# Altium PCB PCB1.PcbDoc (part 2 of 2)
Units mm, origin at the board's own origin, x right, y up, seen from the top; angles counter-clockwise.
Board outline 79.12 x 76.83 mm, 4 copper layers (Top Layer, GND, PWR, Bottom Layer), stack 1.586 mm thick; 64 components, 60 nets, 265 pads, 89 vias.
Unrouted connection lines stored in the file: 60.
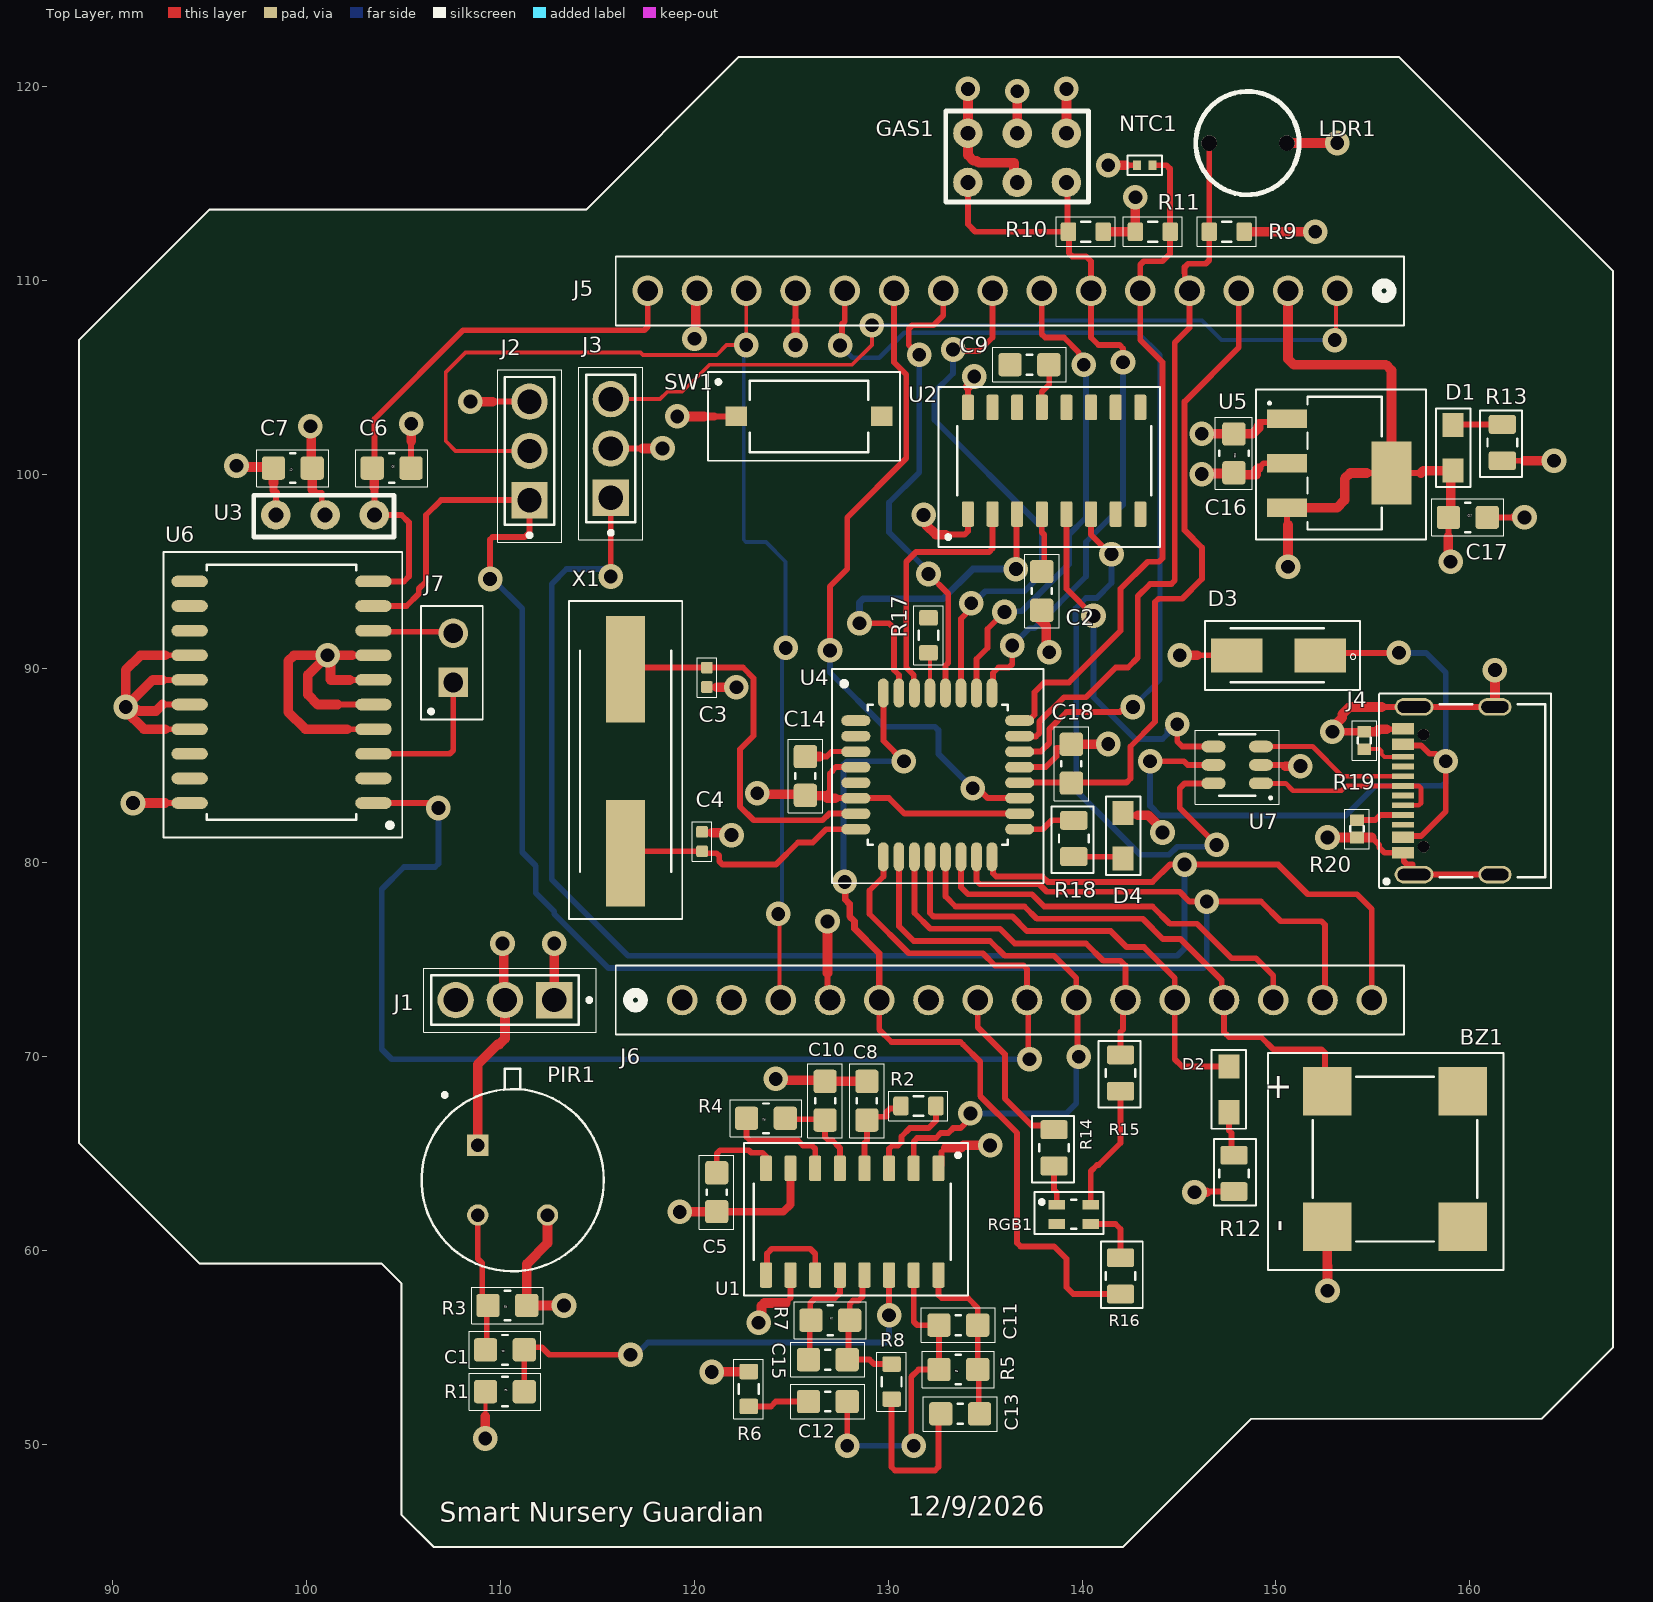
[diagram p0: Top Layer view]

## Via types
v1: diameter 1.27, hole 0.711, Top Layer to Bottom Layer, 89 vias

## Nets (pads, with @x,y where several pads share a name; then routed paths per layer and width w, separated by ;. In a path a pad name is that pad's centre, name@x,y a point inside that pad or via, vN(x,y) a via of type N, cw(c..) or ccw(c..) an arc to the next point about the centre after c; other vN are vias at no path point) (continued)
GND: (continued)
  Top Layer w0.5: 92.583,88.138 92.248,87.803 91.356,87.803 91.295,87.864 90.825,87.864 v1(90.678,88.011) ; 92.583,89.408 92.075,89.408 v1(90.678,88.011) ; 92.71,86.868 91.613,86.868 90.678,87.803 v1(90.678,88.011) ; 92.71,90.678 91.44,90.678 90.678,89.916 v1(90.678,88.011) ; v1(96.393,100.457) 96.456,100.393 98.234,100.393 C7.2 98.298,99.568 ; 101.6,88.138 100.584,88.138 100.076,88.646 100.076,89.662 v1(101.092,90.678) ; 102.108,86.868 99.949,86.868 99.06,87.757 99.06,90.385 99.353,90.678 v1(101.092,90.678) ; 102.235,89.408 101.258,89.408 101.239,89.427 101.239,90.531 v1(101.092,90.678) ; 102.362,90.678 v1(101.092,90.678) ; 105.41,101.727 v1(105.41,102.616) ; v1(108.458,103.759) 109.601,103.759 ; v1(109.22,50.292) 109.22,51.435 ; PIR1.3 112.431,60.361 111.363,59.293 R3.1 v1(113.284,57.15) ; J1.1 v1(112.776,75.819) ; v1(119.126,102.997) 120.523,102.997 ; v1(119.253,61.976) 119.261,61.984 C5.2@121.15,61.984 ; v1(120.015,107.007) 120.078,107.07 120.078,109.41 J5.14 ; v1(120.904,53.721) 120.915,53.732 122.798,53.732 R6.1 ; 120.904,81.534 121.793,81.534 v1(121.92,81.407) ; 121.158,89.027 v1(122.174,89.027) ; v1(123.317,56.261) 123.464,56.408 123.464,57.131 123.61,57.277 124.714,57.277 ; v1(124.206,68.834) 124.269,68.77 126.682,68.77 C10.2 C8.2 ; C14.2 126.476,85.455 ; v1(126.87,76.957) 126.873,76.954 126.873,74.295 ; v1(131.826,97.917) 131.953,97.79 131.953,97.409 132.461,96.901 132.969,96.901 ; GAS1.2 v1(136.652,119.761) ; C2.2 137.795,92.869 137.795,92.553 138.156,92.193 138.156,90.984 v1(138.303,90.837) ; C18.2 139.454,86.098 141.343,86.098 v1(141.351,86.106) ; R10.2 R11.2 v1(142.748,114.3) ; 142.875,82.423 143.413,82.423 144.145,81.691 v1(144.145,81.538) ; v1(145.796,62.992) 146.431,62.992 ; v1(146.173,100.02) 146.209,100.056 147.792,100.056 C16.2 147.932,99.988 148.971,99.988 148.971,100.203 149.098,100.33 ; R9.2 v1(152.019,112.522) ; 150.495,84.963 v1(151.257,84.963) ; BZ1.N 152.639,59.197 152.654,59.182 v1(152.654,57.912) ; v1(152.654,81.28) R20.2 154.94,81.28 ; v1(152.908,86.741) 152.908,86.949 153.409,87.45 153.409,87.623 153.797,88.011 155.448,88.011 ; R19.2 155.194,86.741 155.321,86.868 155.702,86.868 ; J4.S4 v1(161.29,89.916) ; v1@162.306,97.79 v1(162.814,97.79) ; 162.814,100.711 v1(164.338,100.711)
NetC1_1: C1.1 R1.2 U1.14 | length 24.8
  Top Layer w0.3: R1.2 C1.1 111.363,54.991 112.141,54.991 112.522,54.61 v1(116.713,54.61) ; v1(130.048,56.642) U1.14
  Bottom Layer w0.3: v1(116.713,54.61) 116.975,54.61 117.61,55.245 129.872,55.245 130.048,55.421 v1(130.048,56.642)
NetC1_2: C1.2 PIR1.2 R3.2 | length 7.2
  Top Layer w0.3: PIR1.2 108.839,59.559 109.063,59.335 109.063,57.45 R3.2 109.299,57.087 109.299,54.927 C1.2
NetC2_1: C2.1 U2.4 | length 2.9
  Top Layer w0.3: U2.4 137.922,97.028 138.049,96.901 C2.1@138.049,95.123
NetC5_1: C5.1 U1.8 | length 4.4
  Top Layer w0.3: C5.1 121.158,64.975 121.334,65.151 122.809,65.151 122.936,65.024 123.522,65.024 123.698,64.848 U1.8
NetC8_1: C8.1 R2.1 U1.4 | length 4.7
  Top Layer w0.3: U1.4 128.778,65.532 128.905,65.659 C8.1 129.081,66.883 129.921,66.883 129.921,67.134 130.097,67.31 130.534,67.31 R2.1
NetC9_1: C9.1 U2.13 | length 2.4
  Top Layer w0.3: U2.13 137.922,104.267 138.303,104.648 138.303,105.648 C9.1
NetC10_1: C10.1 R4.1 U1.5 | length 5
  Top Layer w0.3: R4.1 124.746,66.754 126.698,66.754 C10.1 126.746,65.835 126.922,65.659 127.127,65.659 127.508,65.278 U1.5
NetC12_1: C12.1 R6.2 | length 3.2
  Top Layer w0.3: R6.2 123.952,51.943 124.206,52.197 C12.1
NetC13_2: C13.2 R8.2 | length 8.9
  Top Layer w0.3: R8.2 130.175,48.817 130.351,48.641 132.412,48.641 132.588,48.817 132.588,51.435 C13.2
NetD1_2: D1.2 R13.1 | length 2.6
  Top Layer w0.3: D1.2 159.164,102.586 R13.1
NetD2_2: D2.2 R12.2 | length 2.3
  Top Layer w0.3: D2.2 147.574,66.167 147.701,66.04 147.701,65.024 R12.2
NetD4_1: D4.1 R18.2 | length 2.6
  Top Layer w0.3: R18.2 142.019,80.294 D4.1
NetJ4_A5: J4.A5 R20.1 | length 2.5
  Top Layer w0.3: R20.1 155.118,82.18 155.381,82.443 J4.A5
NetJ4_B5: J4.B5 R19.1 | length 2.2
  Top Layer w0.2: R19.1 154.57,85.852 155.331,85.852 155.448,85.735 155.448,85.598 155.603,85.443 J4.B5
NetJ7_1: J7.1 U6.3 | length 7.7
  Top Layer w0.3: U6.3 107.393,85.598 107.569,85.774 J7.1
NetJ7_2: J7.2 U6.8 | length 4.2
  Top Layer w0.3: U6.8 103.512,91.891 107.499,91.891 J7.2
NetR2_2: R2.2 U1.3 | length 5
  Top Layer w0.3: U1.3 130.048,65.229 130.224,65.405 130.507,65.405 130.683,65.581 130.683,65.864 131.113,66.294 132.08,66.294 132.461,66.675 R2.2
NetR4_2: R4.2 U1.6 | length 5.8
  Top Layer w0.3: R4.2 122.698,65.835 122.874,65.659 125.349,65.659 125.603,65.405 126.062,65.405 126.238,65.229 U1.6
NetR14_2: R14.2 RGB1.1 | length 2
  Top Layer w0.3: R14.2 138.557,63.119 138.698,62.978 RGB1.1
NetR15_2: R15.2 RGB1.2 | length 6.5
  Top Layer w0.3: RGB1.2 140.448,64.072 140.765,64.389 140.843,64.389 141.986,65.532 R15.2
NetR16_2: R16.2 RGB1.4 | length 3.1
  Top Layer w0.3: RGB1.4 141.724,61.349 141.986,61.087 R16.2
RESET: C9.2 J2.2 J5.13 J6.3 R17.2 SW1.2 U4.29 | length 64.9
  Top Layer w0.2: J2.2 107.686,101.219 107.188,101.717 107.188,105.283 108.204,106.299 117.221,106.299 117.348,106.172 121.158,106.172 121.666,106.68 v1(122.682,106.68) J5.13 ; v1(124.333,77.343) 124.396,77.279 124.396,72.962 J6.3 ; R17.2 132.154,90.731 U4.29
  Bottom Layer w0.2: v1(122.682,106.68) 122.555,106.553 122.555,96.637 122.672,96.52 123.698,96.52 124.714,95.504 v1(124.714,91.059) 124.523,90.868 124.523,77.837 124.234,77.548 124.128,77.548 v1(124.333,77.343)
RX: J6.2 U2.3 U4.31 | length 18
  Top Layer w0.3: v1(128.524,92.329) 130.048,92.329 130.302,92.075 130.302,89.916 130.556,89.662 130.556,88.739 U4.31 ; v1(136.587,95.123) 136.619,95.155 136.619,97.929 U2.3
  Bottom Layer w0.35: v1(128.524,92.329) 128.524,93.394 128.729,93.599 132.842,93.599 134.366,95.123 v1(136.587,95.123)
TX: J6.1 U2.2 U4.30 | length 13.4
  Top Layer w0.3: U4.30 131.316,88.775 131.316,89.664 130.937,90.043 130.937,95.504 131.445,96.012 135.206,96.012 135.382,96.188 U2.2
USB_N: J4.A7 J4.B7 U7.1 | length 10.3
  Top Layer w0.25: U7.1 150.495,84.074 150.876,83.693 153.373,83.693 153.623,83.943 J4.A7 157.363,83.943 157.48,83.826 157.48,83.06 157.363,82.943 J4.B7
USB_P: J4.A6 J4.B6 U7.3 | length 7.9
  Top Layer w0.25: U7.3 151.887,85.974 153.418,84.443 J4.B6
VBUS: D3.P1 J4.A4 J4.A9 U7.5 | length 42.3
  Top Layer w0.3: v1(143.51,85.217) 145.257,85.217 145.45,85.024 U7.5 ; D3.P1 152.4,90.805 v1(156.337,90.805) ; J4.A4 156.6,81.353 157.48,81.353 158.75,82.623 v1(158.75,85.217) 158.623,85.217 158.242,85.598 157.915,85.598 157.48,86.033 156.6,86.033 J4.A9
  Bottom Layer w0.3: v1(143.51,85.217) 143.51,82.913 144,82.423 153.602,82.423 155.126,83.947 158.574,83.947 158.75,84.123 v1(158.75,85.217) 158.75,89.789 157.734,90.805 v1(156.337,90.805)
vin: C6.1 J5.15 U3.1 U6.10 | length 29.6
  Top Layer w0.3: C6.1 103.505,100.441 103.505,102.87 108.077,107.442 117.426,107.442 117.602,107.618 J5.15 ; U6.10 105.029,94.488 105.283,94.742 105.283,97.536 104.902,97.917 U3.1 103.505,99.06
  Top Layer w0.4: 103.505,99.06 103.505,99.314
  Top Layer w0.5: C6.1 103.505,100.219 103.505,99.314
XTAL1: C3.1 U4.7 X1.1 | length 20.2
  Top Layer w0.3: X1.1 116.535,90.043 C3.1 122.51,90.043 123.059,89.494 123.059,86.533 122.359,85.833 122.359,82.873 123.063,82.169 126.619,82.169 126.962,82.512 U4.7
XTAL2: C4.1 U4.8 X1.2 | length 13.1
  Top Layer w0.3: X1.2 116.563,80.571 C4.1 120.499,80.475 121.153,80.475 121.285,80.342 121.285,80.059 121.461,79.883 124.206,79.883 125.349,81.026 126.111,81.026 126.797,81.712 U4.8
pads on no net: BZ1.1 BZ1.2 J4. J4.A8 J4.B8 U2.7 U2.8 U2.9 U2.10 U2.11 U2.12 U2.14 U2.15 U6.11 U6.12 U6.13 U6.18 U6.19

## Polygon pours and split planes (outlines as drawn)
no net on PWR (split plane): 165.628,111.526 166.876,110.279 166.876,55.202 163.492,51.818 148.717,51.818 148.617,51.809 148.522,51.78 148.433,51.732 148.356,51.669 141.902,45.214 106.764,45.214 105.412,46.566 105.412,58.293 105.403,58.393 105.374,58.488 105.326,58.577 105.263,58.654 104.247,59.67 104.17,59.733 104.081,59.781 103.986,59.81 103.886,59.819 94.699,59.819 88.775,65.743 88.775,106.723 95.207,113.155 114.427,113.155 114.527,113.164 114.622,113.193 114.711,113.241 114.788,113.304 122.512,121.029 156.126,121.029
no net on GND (split plane): 165.628,111.526 166.876,110.279 166.876,55.202 163.492,51.818 148.717,51.818 148.617,51.809 148.522,51.78 148.433,51.732 148.356,51.669 141.902,45.214 106.764,45.214 105.412,46.566 105.412,58.293 105.403,58.393 105.374,58.488 105.326,58.577 105.263,58.654 104.247,59.67 104.17,59.733 104.081,59.781 103.986,59.81 103.886,59.819 94.699,59.819 88.775,65.743 88.775,106.723 95.207,113.155 114.427,113.155 114.527,113.164 114.622,113.193 114.711,113.241 114.788,113.304 122.512,121.029 156.126,121.029

## Silkscreen, mask and mechanical layers (free items; w line width, h text height)
Top Overlay:
  lines w0.1: 88.265,65.532 94.488,59.309 103.886,59.309 104.902,58.293 104.902,46.355 106.553,44.704 136.398,44.704 142.113,44.704 148.717,51.308 163.703,51.308 167.386,54.991 167.386,110.49 165.989,111.887 156.337,121.539 122.301,121.539 114.427,113.665 94.996,113.665 88.265,106.934 88.265,65.532
  text "12/9/2026" at 131.01,46.301 h1
  text "Smart Nursery Guardian" at 106.88,45.999 h1

## Text inside footprints (layer, text, board x,y; h text height)
BZ1: Top Overlay "-" at 149.733,61.58 h1.27 r270; Top Overlay "+" at 150.861,68.961 h1.27 r180
C2: Top Designator "C?" at 138.06,94.504 h1 r270
C3: Top Designator "C?" at 120.4,89.67 h0.4 r270
C4: Top Designator "C?" at 120.652,80.944 h0.4 r90
C5: Top Designator "C?" at 121.296,63.5 h1 r270
C8: Top Designator "C?" at 128.767,67.199 h1 r90
C9: Top Designator "C?" at 137.795,105.526 h1 r180
C10: Top Designator "C?" at 126.608,67.199 h1 r90
C11: Top Designator "C?" at 134.128,55.996 h1 r180
C12: Top Designator "C?" at 126.381,52.335 h1
C13: Top Designator "C?" at 134.223,51.424 h1 r180
C14: Top Designator "C?" at 125.592,83.947 h1 r90
C15: Top Designator "C?" at 126.381,54.494 h1
C18: Top Designator "C?" at 139.308,84.582 h1 r90
R2: Top Designator "R?" at 131.561,67.437 h0.5
R6: Top Designator "R?" at 122.809,52.843 h0.5 r270
R8: Top Designator "R?" at 130.175,53.224 h0.5 r270
R9: Top Designator "R?" at 147.458,112.522 h0.5
R10: Top Designator "R?" at 140.197,112.522 h0.5
R11: Top Designator "R?" at 143.648,112.522 h0.5 r180
R12: Mechanical 1 "R?" at 148.59,65.484 h0.15 r270
R13: Mechanical 1 "R?" at 160.909,100.124 h0.15 r90
R14: Mechanical 1 "R?" at 137.795,63.754 h0.15 r90
R15: Mechanical 1 "R?" at 141.224,67.612 h0.15 r90
R16: Mechanical 1 "R?" at 142.748,60.198 h0.15 r270
R17: Top Designator "R?" at 132.08,91.705 h0.5 r270
R18: Mechanical 1 "R?" at 138.811,79.708 h0.15 r90
R19: Top Designator "R?" at 154.559,86.291 h0.5 r90
R20: Top Designator "R?" at 154.178,81.73 h0.5 r270
U4: Top Designator "U?" at 132.554,84.523 h1
U6: Top Designator "U?" at 98.718,88.762 h1 r180
U7: Top Designator "U?" at 148,85.013 h1 r180